# EAGLE board OpenBook_PCB (EAGLE 9.7.0)
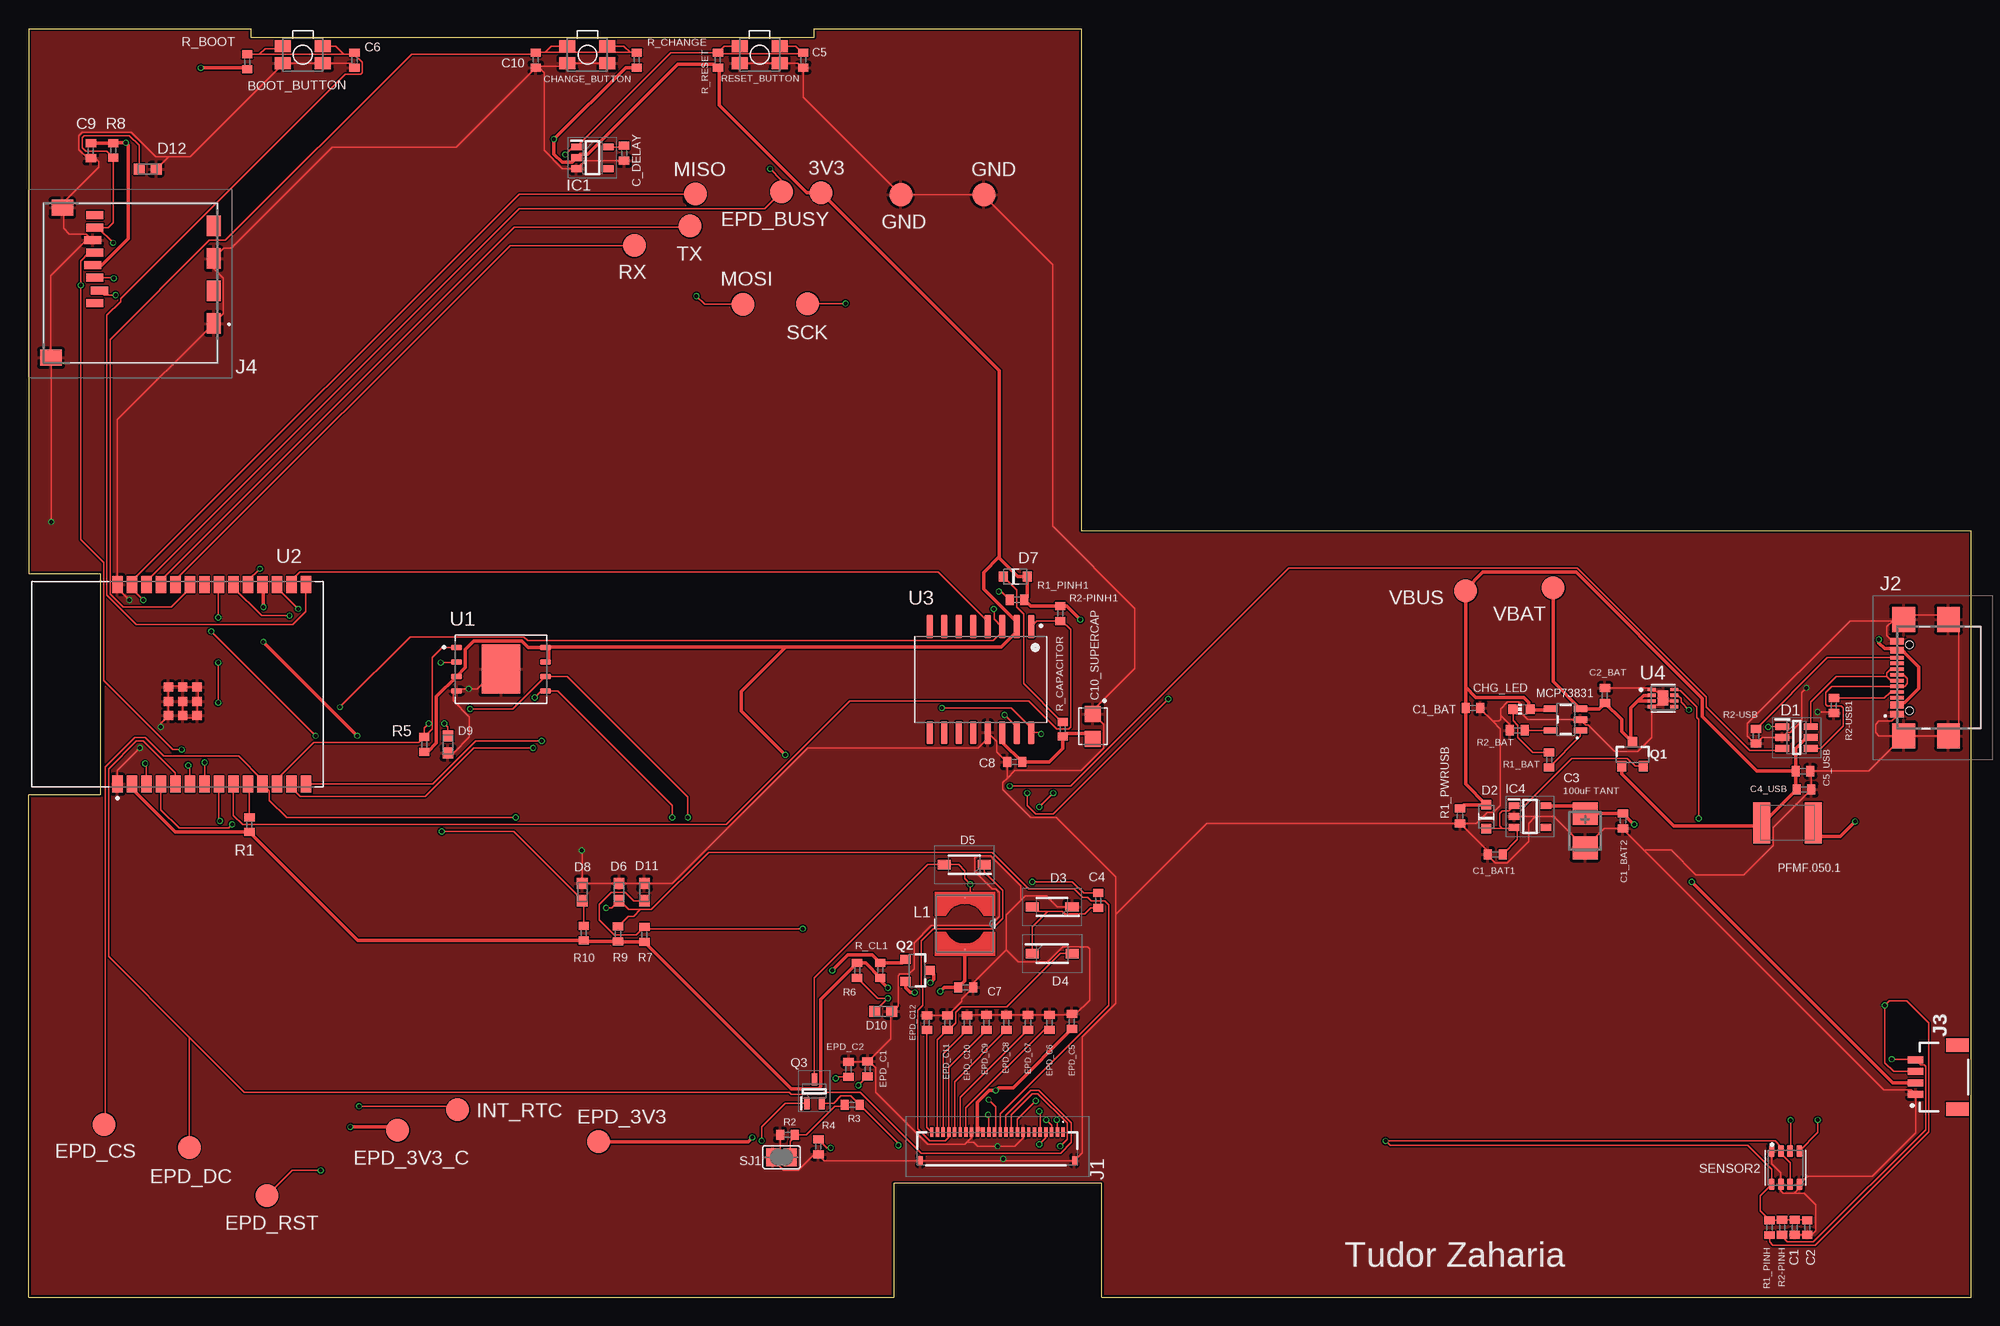
[diagram p0: board, top side]
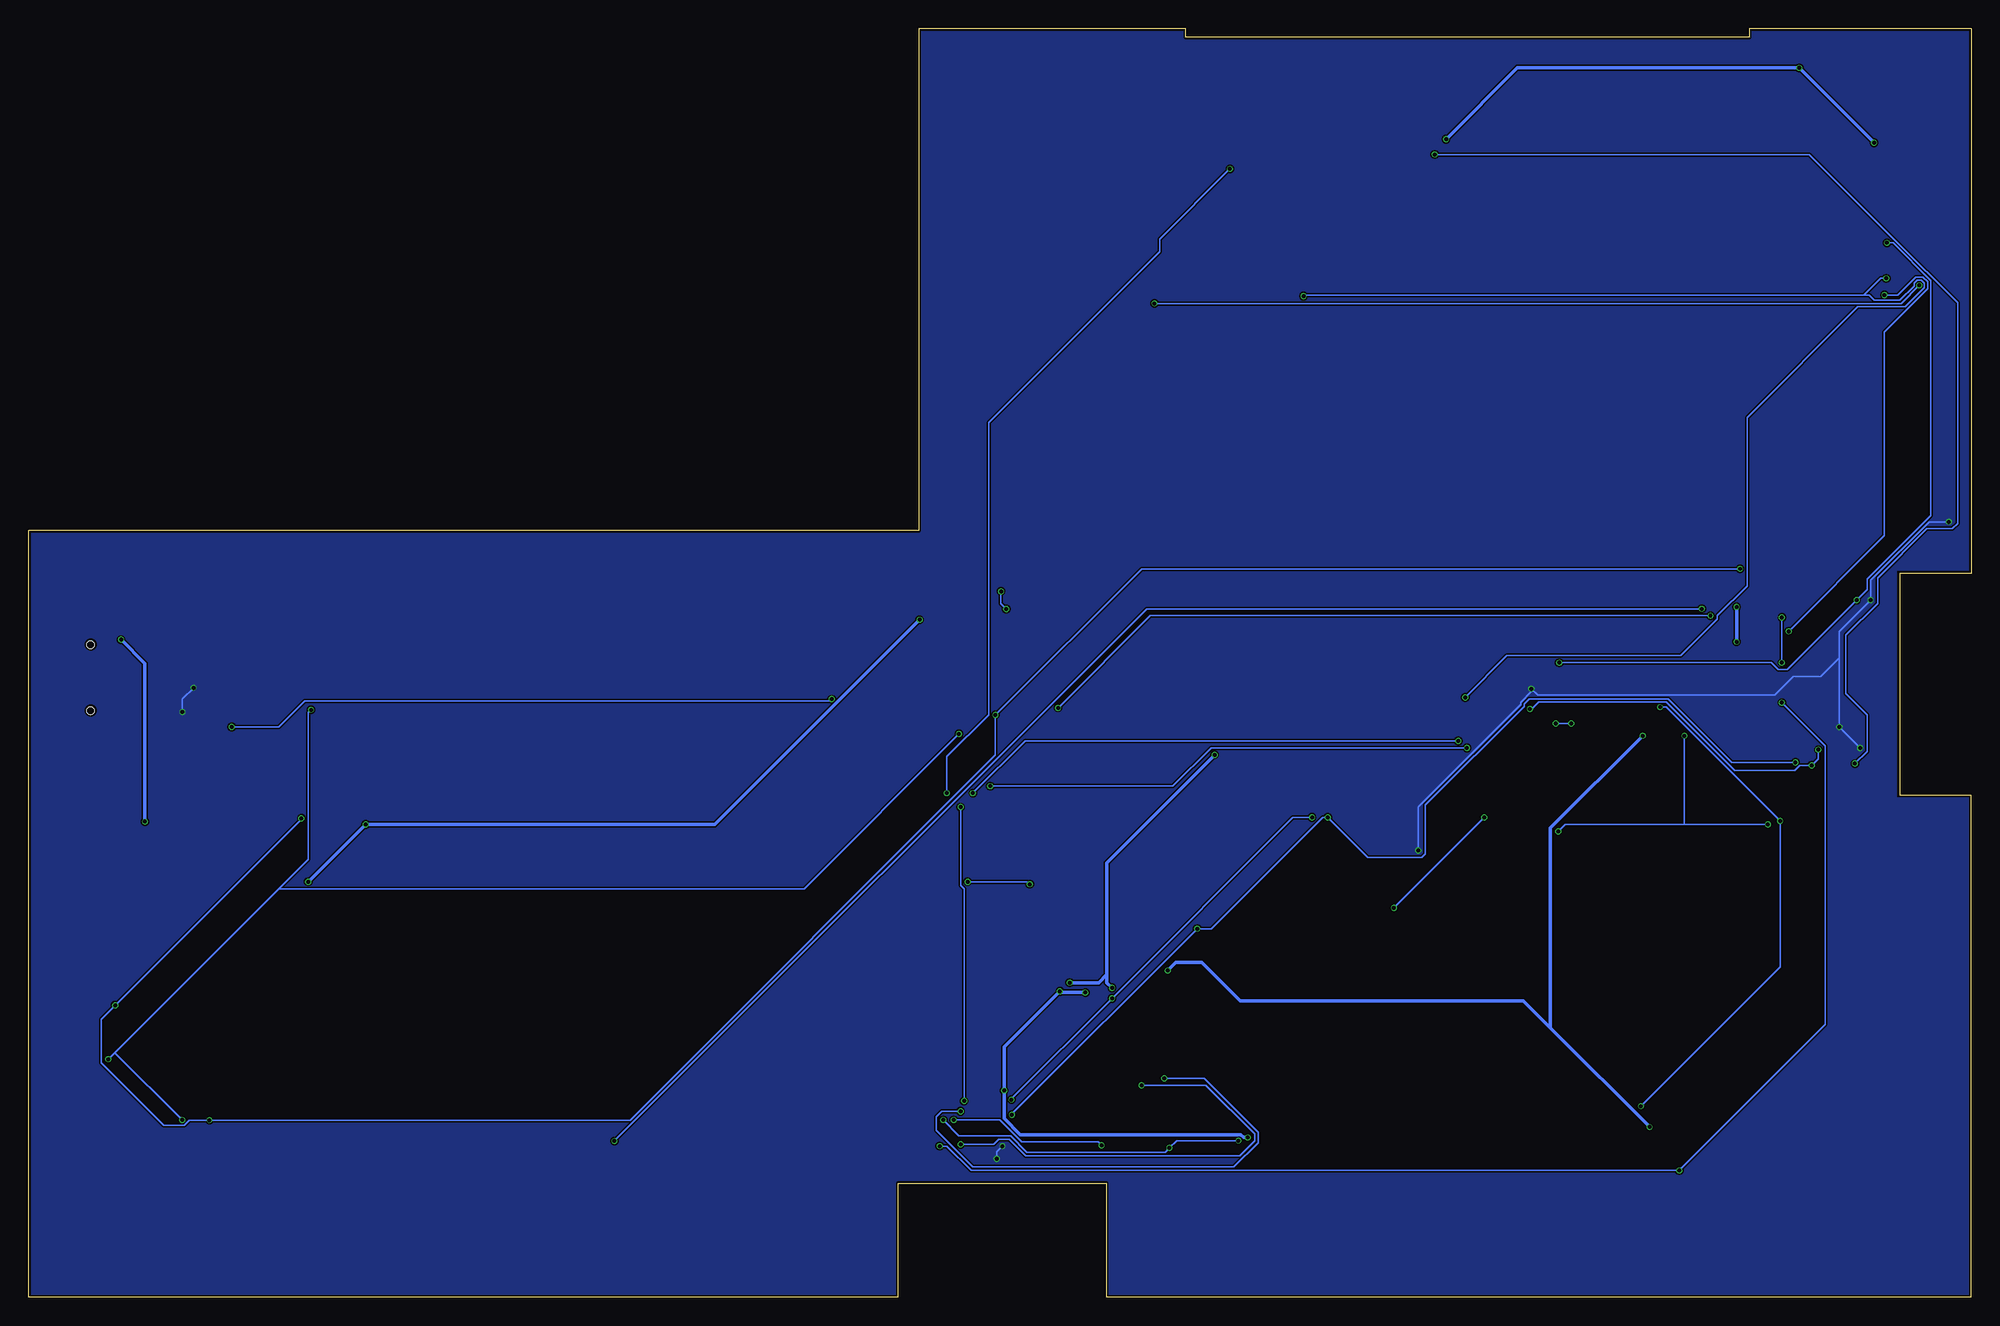
[diagram p1: board, bottom side, seen from below]

Size 170.2 x 111.2 mm. Coordinates in mm from the lower left corner, seen from the top.
Outline: 170.2,0 170.2,67.2 92.2,67.2 92.2,111.2 68.85,111.2 68.85,110.45 19.45,110.45 19.45,111.2 0,111.2 0,63.45 6.29,63.45 6.29,44.05 0,44.05 0,0 75.8,0 75.8,10 94,10 94,0 170.2,0
Copper layers (1*16): Top 0.035mm / dielectric 1.6mm / Bottom 0.035mm
Design rules "jlcpcb-2layers.dru *": minimum track width 5mil, minimum drill 0.3mm, track to track 5mil, track to pad 5mil, pad to pad 5mil, via to via 5mil, smd to smd 5mil, copper to edge 0.2mm, drill to drill 6mil, minimum pad ring 10mil, minimum via ring 3mil, stop-mask expansion 4mil, vias tented up to drill 0mil, thermal gap 10mil

## Footprints (pad centres in the part's own frame; a part is rotated, then mirrored left to right if it is on the bottom)
MYBUTTON = smd 1.4 x 1.05: 1 1.75,0.75; 2 -1.75,0.75; 3 -1.75,-0.75; 4 1.75,-0.75
EAGLE-LTSPICE_C0402 = smd 0.7 x 0.9: 1 -0.65,0; 2 0.65,0
RCL_CT3528 = smd 2 x 2.2: + -1.5,0; - 1.5,0
CAPCP3225X100N = smd 1.4 x 1.4: 1 -1.1,0; 2 1.1,0
ADAFRUIT_CHIP-LED0603 = smd 0.8 x 0.8: A 0,-0.75; C 0,0.75
SOT95P280X145-6N = smd 1.2 x 0.6: 1 -1.25,0.95; 2 -1.25,0; 3 -1.25,-0.95; 4 1.25,-0.95; 5 1.25,0; 6 1.25,0.95
ESP32_WROVER_AVX---SD0805S020S1R0_AVX_SD0805S020S1R0_0 = smd 0.8 x 0.9: 1 -1.05,0; 2 1.05,0
SOD3716X135N = smd 1.15 x 0.8: 1 -1.75,0; 2 1.75,0
DIOC1608X36N = smd 0.97 x 0.94: 1 -0.75,0; 2 0.75,0
SOT95P280X125-5N = smd 0.9 x 0.6: 1 -1.4,0.95; 2 -1.4,0; 3 -1.4,-0.95; 4 1.4,-0.95; 5 1.4,0.95
SOT95P280X120-5N = smd 0.9 x 0.6: 1 -1.4,0.95; 2 -1.4,0; 3 -1.4,-0.95; 4 1.4,-0.95; 5 1.4,0.95
FH34SRJ24S05SH99 = smd 0.3 x 0.8: 1 5.75,1.45; 2 5.25,1.45; 3 4.75,1.45; 4 4.25,1.45; 5 3.75,1.45; 6 3.25,1.45; 7 2.75,1.45; 8 2.25,1.45; 9 1.75,1.45; 10 1.25,1.45; 11 0.75,1.45; 12 0.25,1.45; 13 -0.25,1.45; 14 -0.75,1.45; 15 -1.25,1.45; 16 -1.75,1.45; 17 -2.25,1.45; 18 -2.75,1.45; 19 -3.25,1.45; 20 -3.75,1.45; 21 -4.25,1.45; 22 -4.75,1.45; 23 -5.25,1.45; 24 -5.75,1.45 | smd 0.4 x 0.8: MP1 6.75,-1.05; MP2 -6.75,-1.05
SAMACSYS_PARTS_USB4110GFA = smd 0.3 x 1.15: A1 -3.35,3.678; A4 -2.55,3.678; A5 -1.25,3.678; A6 -0.25,3.678; A7 0.25,3.678; A8 1.25,3.678; A9 2.55,3.678; A12 3.35,3.678; B1 3.05,3.678; B4 2.25,3.678; B5 1.75,3.678; B6 0.75,3.678; B7 -0.75,3.678; B8 -1.75,3.678; B9 -2.25,3.678; B12 -3.05,3.678 | smd 2.18 x 2: MP1 -5.11,-0.827; MP2 5.11,-0.827; MP3 -5.11,3.103; MP4 5.11,3.103 | hole 0.65: -2.89,2.603; 2.89,2.603
JST04_1MM_RA = smd 0.6 x 1.35: 1 -1.5,0; 2 -0.5,0; 3 0.5,0; 4 1.5,0 | smd 1.2 x 2: NC1 2.8,-3.675; NC2 -2.8,-3.675
112ATAARR03ATTEND = smd 1.8 x 1.2: G1 10.6,10.4; G2 4.9,10.4; S1 7.75,10.4; S2 2.05,10.4 | smd 1.4 x 1.9: G3 13.6,-3.85; G4 0.45,-2.85 | smd 0.7 x 1.5: P1 8.8,0; P2 7.7,0.4; P3 6.6,0; P4 5.5,-0.2; P5 4.4,0; P6 3.3,-0.2; P7 2.2,0; P8 1.1,0
IND_4828-WE-TPC_WRE = smd 0.127 x 0.127: 1 -2.286,0; 2 2.286,0
ESP32_WROVER_SPARKFUN-IC-POWER_SOT23-5 = smd 0.55 x 1.2: 1 -0.95,-1.3; 2 0,-1.3; 3 0.95,-1.3; 4 0.95,1.3; 5 -0.95,1.3
ESP32C6_VARISTOR_CT/CN1812 = smd 1.5 x 3.6: 1 -2.25,0; 2 2.25,0
ESP32_WROVER_SPARKFUN-DISCRETESEMI_SOT23-3 = smd 0.8 x 0.9: 1 -0.95,-1; 2 0.95,-1; 3 0,1.1
SOT65P210X110-3N = smd 1.05 x 0.5: 1 -1.05,0.65; 2 -1.05,-0.65; 3 1.05,0
ESP32_WROVER_EAGLE-LTSPICE_R0402 = smd 0.7 x 0.9: 1 -0.65,0; 2 0.65,0
ESP32_WROVER_BME680_PSON80P300X300X100-8N = smd 1.016 x 0.5: 1 1.458,1.2; 2 1.458,0.4; 3 1.458,-0.4; 4 1.458,-1.2; 5 -1.458,-1.22; 6 -1.458,-0.4; 7 -1.458,0.4; 8 -1.458,1.2
SJ = smd 1.168 x 1.6: 1 -0.762,0; 2 0.762,0
TP20R = smd 2 x 2: TP 0,0
SON127P600X800X80-9N = smd 0.94 x 0.44: 1 -3.895,1.905; 2 -3.895,0.635; 3 -3.895,-0.635; 4 -3.895,-1.905; 5 3.895,-1.905; 6 3.895,-0.635; 7 3.895,0.635; 8 3.895,1.905 | smd 3.4 x 4.3: 9 0,0
XCVR_ESP32-C6-WROOM-1-N8 = smd 1.5 x 0.9: 1 -8.75,5.26; 2 -8.75,3.99; 3 -8.75,2.72; 4 -8.75,1.45; 5 -8.75,0.18; 6 -8.75,-1.09; 7 -8.75,-2.36; 8 -8.75,-3.63; 9 -8.75,-4.9; 10 -8.75,-6.17; 11 -8.75,-7.44; 12 -8.75,-8.71; 13 -8.75,-9.98; 14 -8.75,-11.25; 15 8.75,-11.25; 16 8.75,-9.98; 17 8.75,-8.71; 18 8.75,-7.44; 19 8.75,-6.17; 20 8.75,-4.9; 21 8.75,-3.63; 22 8.75,-2.36; 23 8.75,-1.09; 24 8.75,0.18; 25 8.75,1.45; 26 8.75,2.72; 27 8.75,3.99; 28 8.75,5.26 | smd 0.8 x 0.8: 29_1 -2.755,0.79; 29_2 -1.505,0.79; 29_3 -0.255,0.79; 29_4 -2.755,-0.46; 29_5 -1.505,-0.46; 29_6 -0.255,-0.46; 29_7 -2.755,-1.71; 29_8 -1.505,-1.71; 29_9 -0.255,-1.71
SOIC127P1032X265-16N = smd 2.05 x 0.59: 1 -4.655,4.445; 2 -4.655,3.175; 3 -4.655,1.905; 4 -4.655,0.635; 5 -4.655,-0.635; 6 -4.655,-1.905; 7 -4.655,-3.175; 8 -4.655,-4.445; 9 4.655,-4.445; 10 4.655,-3.175; 11 4.655,-1.905; 12 4.655,-0.635; 13 4.655,0.635; 14 4.655,1.905; 15 4.655,3.175; 16 4.655,4.445
SON50P200X200X80-9N = smd 0.76 x 0.27: 1 -0.985,0.75; 2 -0.985,0.25; 3 -0.985,-0.25; 4 -0.985,-0.75; 5 0.985,-0.75; 6 0.985,-0.25; 7 0.985,0.25; 8 0.985,0.75 | smd 0.9 x 1.3: 9 0,0

## Placement (x,y rotation side)
BOOT_BUTTON  BUTTON_CUSYOMV1  [MYBUTTON]  24.03,108.91 180 top
C1  100nF  [EAGLE-LTSPICE_C0402]  154.71,6.13 270 top
C1_BAT  4.7uF  [EAGLE-LTSPICE_C0402]  126.53,51.65 0 top
C1_BAT1  4.7uF  [EAGLE-LTSPICE_C0402]  128.48,38.82 180 top
C1_BAT2  4.7uF  [EAGLE-LTSPICE_C0402]  139.67,41.77 270 top
C2  100nF  [EAGLE-LTSPICE_C0402]  155.82,6.13 270 top
C2_BAT  4.7uF  [EAGLE-LTSPICE_C0402]  138.09,52.75 90 top
C3  100uF TANT  [RCL_CT3528]  136.36,40.9 270 top
C4  4.7uF/25V  [EAGLE-LTSPICE_C0402]  93.71,34.79 90 top
C4_USB  100nF  [EAGLE-LTSPICE_C0402]  155.53,44.52 0 top
C5  1uF  [EAGLE-LTSPICE_C0402]  67.86,108.43 270 top
C5_USB  4.7uF  [EAGLE-LTSPICE_C0402]  155.44,46.12 0 top
C6  100nF  [EAGLE-LTSPICE_C0402]  28.55,108.43 270 top
C7  10uF  [EAGLE-LTSPICE_C0402]  82.09,27.18 0 top
C8  100nF  [EAGLE-LTSPICE_C0402]  86.38,46.93 180 top
C9  100nF  [EAGLE-LTSPICE_C0402]  5.46,100.48 270 top
C10  100nF  [EAGLE-LTSPICE_C0402]  44.44,108.43 270 top
C10_SUPERCAP  CPH3225A  [CAPCP3225X100N]  93.24,50.04 270 top
C_DELAY  100nF  [EAGLE-LTSPICE_C0402]  52.17,100.27 270 top
CHANGE_BUTTON  BUTTON_CUSYOMV1  [MYBUTTON]  48.96,108.91 180 top
CHG_LED  [ADAFRUIT_CHIP-LED0603]  130.79,51.55 90 top
D1  USBLC6-2SC6Y  [SOT95P280X145-6N]  154.88,49.07 0 top
D2  ESP32_WROVER_AVX---SD0805S020S1R0_AVX_SD0805S020S1R0_0_0AVX_SD0805S020S1R0_0_0  [ESP32_WROVER_AVX---SD0805S020S1R0_AVX_SD0805S020S1R0_0]  127.69,42.13 90 top
D3  MBR0530  [SOD3716X135N]  89.66,34.22 180 top
D4  MBR0530  [SOD3716X135N]  89.67,30.13 0 top
D5  MBR0530  [SOD3716X135N]  81.96,37.93 180 top
D6  PGB1010603MR  [DIOC1608X36N]  51.73,35.52 90 top
D7  ESP32_WROVER_AVX---SD0805S020S1R0_AVX_SD0805S020S1R0_0_0AVX_SD0805S020S1R0_0_0  [ESP32_WROVER_AVX---SD0805S020S1R0_AVX_SD0805S020S1R0_0]  86.44,63.18 0 top
D8  PGB1010603MR  [DIOC1608X36N]  48.51,35.52 90 top
D9  PGB1010603MR  [DIOC1608X36N]  36.74,48.47 270 top
D10  PGB1010603MR  [DIOC1608X36N]  74.87,25.07 0 top
D11  PGB1010603MR  [DIOC1608X36N]  53.95,35.52 90 top
D12  PGB1010603MR  [DIOC1608X36N]  10.43,98.87 0 top
EPD_C1  1uF/50V  [EAGLE-LTSPICE_C0402]  73.5,20.02 90 top
EPD_C2  1uF/50V  [EAGLE-LTSPICE_C0402]  71.83,20 90 top
EPD_C5  0.1uF/50V  [EAGLE-LTSPICE_C0402]  91.4,24.19 90 top
EPD_C6  1uF/50V  [EAGLE-LTSPICE_C0402]  89.44,24.1 90 top
EPD_C7  1uF/50V  [EAGLE-LTSPICE_C0402]  87.55,24.1 90 top
EPD_C8  1uF/50V  [EAGLE-LTSPICE_C0402]  85.66,24.1 90 top
EPD_C9  1uF/50V  [EAGLE-LTSPICE_C0402]  83.92,24.1 90 top
EPD_C10  1uF/50V  [EAGLE-LTSPICE_C0402]  82.21,24.09 90 top
EPD_C11  1uF/50V  [EAGLE-LTSPICE_C0402]  80.49,24.09 90 top
EPD_C12  1uF/50V  [EAGLE-LTSPICE_C0402]  78.7,24.09 90 top
IC1  BD5229G-TR  [SOT95P280X125-5N]  49.4,99.87 0 top
IC4  XC6220A331MR-G  [SOT95P280X120-5N]  131.53,42.14 0 top
J1  FH34SRJ-24S-0.5SH_99_  [FH34SRJ24S05SH99]  84.87,13.04 0 top
J2  SAMACSYS_PARTS_USB4110-GF-A  [SAMACSYS_PARTS_USB4110GFA]  167.36,54.31 90 top
J3  QWIIC_RIGHT_ANGLE  [JST04_1MM_RA]  165.31,19.31 90 top
J4  112A-TAAR-R03_ATTEND  [112ATAARR03ATTEND]  5.82,95.95 270 top
L1  68uH  [IND_4828-WE-TPC_WRE]  82.02,32.75 270 top
MCP73831  ESP32_WROVER_SPARKFUN-IC-POWER_MCP73831  [ESP32_WROVER_SPARKFUN-IC-POWER_SOT23-5]  134.65,50.64 90 top
PFMF.050.1  ESP32C6_VARISTORCN1812  [ESP32C6_VARISTOR_CT/CN1812]  154.09,41.6 180 top
Q1  20V/4.2A/52mΩ/1.4W  [ESP32_WROVER_SPARKFUN-DISCRETESEMI_SOT23-3]  140.51,47.56 0 top
Q2  20V/4.2A/52mΩ/1.4W  [ESP32_WROVER_SPARKFUN-DISCRETESEMI_SOT23-3]  77.83,28.66 270 top
Q3  SI1308EDL-T1-GE3  [SOT65P210X110-3N]  68.84,18.08 90 top
R1  10K  [ESP32_WROVER_EAGLE-LTSPICE_R0402]  19.35,41.43 90 top
R1_BAT  200  [ESP32_WROVER_EAGLE-LTSPICE_R0402]  133.2,47.1 90 top
R1_PINH  10K  [ESP32_WROVER_EAGLE-LTSPICE_R0402]  152.51,6.12 90 top
R1_PINH1  10K  [ESP32_WROVER_EAGLE-LTSPICE_R0402]  86.59,61.14 0 top
R1_PWRUSB  100K  [ESP32_WROVER_EAGLE-LTSPICE_R0402]  125.4,42.19 90 top
R2  2.2  [ESP32_WROVER_EAGLE-LTSPICE_R0402]  66.48,14.26 0 top
R2-PINH  10K  [ESP32_WROVER_EAGLE-LTSPICE_R0402]  153.61,6.14 90 top
R2-PINH1  10K  [ESP32_WROVER_EAGLE-LTSPICE_R0402]  90.38,59.94 90 top
R2-USB  5k1  [ESP32_WROVER_EAGLE-LTSPICE_R0402]  151.33,49.18 270 top
R2-USB1  5k1  [ESP32_WROVER_EAGLE-LTSPICE_R0402]  158.15,51.87 90 top
R2_BAT  2K  [ESP32_WROVER_EAGLE-LTSPICE_R0402]  130.41,49.7 0 top
R3  0.47  [ESP32_WROVER_EAGLE-LTSPICE_R0402]  72.16,16.88 180 top
R4  10K  [ESP32_WROVER_EAGLE-LTSPICE_R0402]  69.19,13.21 270 top
R5  10K  [ESP32_WROVER_EAGLE-LTSPICE_R0402]  34.66,48.46 270 top
R6  10K  [ESP32_WROVER_EAGLE-LTSPICE_R0402]  72.58,28.66 90 top
R7  10K  [ESP32_WROVER_EAGLE-LTSPICE_R0402]  53.95,31.81 270 top
R8  10K  [ESP32_WROVER_EAGLE-LTSPICE_R0402]  7.42,100.51 90 top
R9  10K  [ESP32_WROVER_EAGLE-LTSPICE_R0402]  51.64,31.86 270 top
R10  10K  [ESP32_WROVER_EAGLE-LTSPICE_R0402]  48.63,31.93 270 top
R_BOOT  10K  [ESP32_WROVER_EAGLE-LTSPICE_R0402]  19.16,108.28 90 top
R_CAPACITOR  15  [ESP32_WROVER_EAGLE-LTSPICE_R0402]  90.6,49.79 90 top
R_CHANGE  10K  [ESP32_WROVER_EAGLE-LTSPICE_R0402]  53.27,108.43 90 top
R_CL1  10K  [ESP32_WROVER_EAGLE-LTSPICE_R0402]  74.61,28.68 90 top
R_RESET  10K  [ESP32_WROVER_EAGLE-LTSPICE_R0402]  60.39,108.43 90 top
RESET_BUTTON  BUTTON_CUSYOMV1  [MYBUTTON]  64.05,108.91 180 top
SENSOR2  BME688  [ESP32_WROVER_BME680_PSON80P300X300X100-8N]  153.91,11.37 90 top
SJ1  [SJ]  65.96,12.29 0 top
TP1  TX  [TP20R]  57.96,93.89 0 top
TP2  RX  [TP20R]  53.08,92.19 0 top
TP3  VBAT  [TP20R]  133.55,62.19 0 top
TP4  GND  [TP20R]  76.42,96.64 0 top
TP5  GND  [TP20R]  83.69,96.64 0 top
TP6  MISO  [TP20R]  58.41,96.69 0 top
TP7  MOSI  [TP20R]  62.58,87.04 0 top
TP8  SCK  [TP20R]  68.25,87.09 0 top
TP9  EPD_BUSY  [TP20R]  65.97,96.89 0 top
TP10  EPD_CS  [TP20R]  6.63,15.16 0 top
TP11  EPD_DC  [TP20R]  14.09,13.14 0 top
TP12  EPD_RST  [TP20R]  20.88,8.91 0 top
TP13  EPD_3V3_C  [TP20R]  32.33,14.66 0 top
TP14  VBUS  [TP20R]  125.88,61.91 0 top
TP15  INT_RTC  [TP20R]  37.58,16.46 0 top
TP16  3V3  [TP20R]  69.43,96.81 0 top
TP17  EPD_3V3  [TP20R]  49.93,13.66 0 top
U1  W25Q512JVEIQ  [SON127P600X800X80-9N]  41.39,55.06 0 top
U2  ESP32-C6-WROOM-1-N8  [XCVR_ESP32-C6-WROOM-1-N8]  13.05,53.74 90 top
U3  DS3231SN#  [SOIC127P1032X265-16N]  83.4,54.15 270 top
U4  MAX17048G+T10  [SON50P200X200X80-9N]  143.19,52.52 0 top

## Library data of the parts
BOOT_BUTTON CHANGE_BUTTON CHG_LED PFMF.050.1 RESET_BUTTON SJ1 TP1-TP17 = DeskAssistant v19 v1
C1 C1_BAT C1_BAT1 C1_BAT2 C2 C2_BAT C4 C4_USB C5 C5_USB C6-C10 C_DELAY EPD_C1 EPD_C2 EPD_C5-EPD_C12 = DeskAssistant v19 v1; SPICEMODEL: NONE; SPICEPREFIX: C
C3 = DeskAssistant v19 v1; SPICEPREFIX: C
C10_SUPERCAP = DeskAssistant v19 v1; AVAILABILITY: Not in stock; CHECK_PRICES: https://www.snapeda.com/parts/CPH3225A/Seiko+Instruments/view-part/?ref=eda; DESCRIPTION: 11 mF (EDLC) Supercapacitor 3.3 V 1210 (3225 Metric) - -; MF: Seiko Instruments; MP: CPH3225A; PACKAGE: 1210 Seiko; PRICE: None; PURCHASE-URL: https://www.snapeda.com/api/url_track_click_mouser/?unipart_id=562593&manufacturer=Seiko Instruments&part_name=CPH3225A&search_term=None; SNAPEDA_LINK: https://www.snapeda.com/parts/CPH3225A/Seiko+Instruments/view-part/?ref=snap
D1 = DeskAssistant v19 v1; AVAILABILITY: In Stock; CHECK_PRICES: https://www.snapeda.com/parts/USBLC6-2SC6Y/STMicroelectronics/view-part/?ref=eda; DESCRIPTION: 17V Clamp 5A (8/20µs) Ipp Tvs Diode Surface Mount SOT-23-6; MF: STMicroelectronics; MP: USBLC6-2SC6Y; PACKAGE: SOT-23-6 STMicroelectronics; PRICE: None; SNAPEDA_LINK: https://www.snapeda.com/parts/USBLC6-2SC6Y/STMicroelectronics/view-part/?ref=snap
D2 D7 = DeskAssistant v19 v1; CENTROID_NOT_SPECIFIED: No; DATASHEET: http://datasheets.avx.com/schottky.pdf; DIGIKEY_DESCRIPTION: DIODE SCHOTTKY 20V 1A 0805; DIGIKEY_PART_NUMBER: 478-7800-1-ND; LEAD_FREE: yes; MF: AVX; MOUSER_PART_NUMBER: 581-SD0805S020S1R0; PACKAGE: 0805 (2012 metric); PREFIX: D; ROHS: yes; TEMPERATURE_RANGE_HIGH: +125°C; TEMPERATURE_RANGE_LOW: -55°C
D3-D5 = DeskAssistant v19 v1; AVAILABILITY: In Stock; CHECK_PRICES: https://www.snapeda.com/parts/MBR0530/Onsemi/view-part/?ref=eda; DESCRIPTION: Diode Schottky 30 V 500mA Surface Mount SOD-123; MF: ON Semiconductor; MP: MBR0530; PACKAGE: SOD-123-2 ON Semiconductor; PRICE: None; PURCHASE-URL: https://www.snapeda.com/api/url_track_click_mouser/?unipart_id=179458&manufacturer=ON Semiconductor&part_name=MBR0530&search_term=None; SNAPEDA_LINK: https://www.snapeda.com/parts/MBR0530/Onsemi/view-part/?ref=snap
D6 D8-D12 = DeskAssistant v19 v1; AVAILABILITY: In Stock; CHECK_PRICES: https://www.snapeda.com/parts/PGB1010603MR/Littelfuse/view-part/?ref=eda; DESCRIPTION: 150V (Typ) Clamp - Ipp Tvs Diode Surface Mount 0603 (1608 Metric); MF: Littelfuse Inc.; MP: PGB1010603MR; PACKAGE: 0603 Littelfuse Inc.; PRICE: None; PURCHASE-URL: https://www.snapeda.com/api/url_track_click_mouser/?unipart_id=5659453&manufacturer=Littelfuse Inc.&part_name=PGB1010603MR&search_term=None; SNAPEDA_LINK: https://www.snapeda.com/parts/PGB1010603MR/Littelfuse/view-part/?ref=snap
IC1 = DeskAssistant v19 v1; DESCRIPTION: Voltage Detector with Adjustable Delay Time: CMOS processes are utilized to develop high precision, low current consumption CMOS reset ICs that allow arbitrary setting of the delay time. The extensive lineup includes both Nch Open Drain and CMOS output types in a wide range of detection voltages (from 2.3V to 6.0V, in 0.1V steps), enabling selection of the ideal solution based on customer requirements. In addition, the entire series is of course both lead-free and RoHS-compliant.; HEIGHT: 1.25mm; MANUFACTURER_NAME: ROHM Semiconductor; MANUFACTURER_PART_NUMBER: BD5229G-TR; MOUSER_PART_NUMBER: 755-BD5229G-TR; MOUSER_PRICE-STOCK: https://www.mouser.co.uk/ProductDetail/ROHM-Semiconductor/BD5229G-TR?qs=4kLU8WoGk0vvnhrrYwdszw%3D%3D
IC4 = DeskAssistant v19 v1; DESCRIPTION: LDO Voltage Regulators; HEIGHT: 1.2mm; MANUFACTURER_NAME: Torex; MANUFACTURER_PART_NUMBER: XC6220A331MR-G; MOUSER_PART_NUMBER: 865-XC6220A331MR-G; MOUSER_PRICE-STOCK: https://www.mouser.co.uk/ProductDetail/Torex-Semiconductor/XC6220A331MR-G?qs=AsjdqWjXhJ8ZSWznL1J0gg%3D%3D
J1 = DeskAssistant v19 v1; DESCRIPTION: 24 Position FFC, FPC Connector Contacts, Top and Bottom 0.020" (0.50mm) Surface Mount, Right Angle; HEIGHT: 1.1mm; MANUFACTURER_NAME: Hirose; MANUFACTURER_PART_NUMBER: FH34SRJ-24S-0.5SH(99); MOUSER_PART_NUMBER: 798-FH34SRJ24S05SH99; MOUSER_PRICE-STOCK: https://www.mouser.co.uk/ProductDetail/Hirose-Connector/FH34SRJ-24S-0.5SH99?qs=vcbW%252B4%252BSTIpKBl5ap9J8Fw%3D%3D
J2 = DeskAssistant v19 v1; DESCRIPTION: CONN USB 2.0 TYPE-C R/A SMT; HEIGHT: 3.26mm; MANUFACTURER_NAME: GCT (GLOBAL CONNECTOR TECHNOLOGY); MANUFACTURER_PART_NUMBER: USB4110-GF-A; MOUSER_PART_NUMBER: 640-USB4110-GF-A; MOUSER_PRICE-STOCK: https://www.mouser.co.uk/ProductDetail/GCT/USB4110-GF-A?qs=KUoIvG%2F9IlYiZvIXQjyJeA%3D%3D
J3 = DeskAssistant v19 v1; PROD_ID: CONN-13694
J4 = DeskAssistant v19 v1; DESCRIPTION: Micro SD Card Socket, Push-Push Type, Top Mount, SMT, H=1.83mm, 10u; HEIGHT: 1.9mm; MANUFACTURER_NAME: ATTEND; MANUFACTURER_PART_NUMBER: 112A-TAAR-R03 ATTEND
L1 = DeskAssistant v19 v1; COPYRIGHT: Copyright (C) 2024 Ultra Librarian. All rights reserved.; MANUFACTURER_PART_NUMBER: 744043680; MFR_NAME: Wurth Electronics
MCP73831 = DeskAssistant v19 v1; PROD_ID: IC-09995
Q1 Q2 = DeskAssistant v19 v1; PROD_ID: TRAN-14388
Q3 = DeskAssistant v19 v1; AVAILABILITY: In Stock; CHECK_PRICES: https://www.snapeda.com/parts/SI1308EDL-T1-GE3/Vishay+Siliconix/view-part/?ref=eda; DESCRIPTION: Si1308EDL-T1-GE3 N-channel MOSFET Transistor, 1.5 A, 30 V, 3-Pin SC-70 | Siliconix / Vishay SI1308EDL-T1-GE3; MF: Vishay Siliconix; MP: SI1308EDL-T1-GE3; PACKAGE: SOT-323 Vishay Semiconductor; PRICE: None; PURCHASE-URL: https://www.snapeda.com/api/url_track_click_mouser/?unipart_id=274603&manufacturer=Vishay Siliconix&part_name=SI1308EDL-T1-GE3&search_term=None; SNAPEDA_LINK: https://www.snapeda.com/parts/SI1308EDL-T1-GE3/Vishay+Siliconix/view-part/?ref=snap
R1 R1_BAT R1_PINH R1_PINH1 R1_PWRUSB R2 R2-PINH R2-PINH1 R2-USB R2-USB1 R2_BAT R3-R10 R_BOOT R_CAPACITOR R_CHANGE R_CL1 R_RESET = DeskAssistant v19 v1; SPICEMODEL: NONE; SPICEPREFIX: R
SENSOR2 = DeskAssistant v19 v1; AVAILABILITY: Unavailable; DESCRIPTION: Integrated Environmental Unit; MF: Bosch Sensortec; MP: BME680; PACKAGE: LGA-8 Bosch Tools; PRICE: None
U1 = DeskAssistant v19 v1; AVAILABILITY: In Stock; CHECK_PRICES: https://www.snapeda.com/parts/W25Q512JVEIQ/Winbond+Electronics/view-part/?ref=eda; DESCRIPTION: FLASH - NOR Memory IC 512Mb (64M x 8) SPI - Quad I/O 133 MHz 8-WSON (8x6); MF: Winbond Electronics; MP: W25Q512JVEIQ; PACKAGE: Package; PRICE: None; SNAPEDA_LINK: https://www.snapeda.com/parts/W25Q512JVEIQ/Winbond+Electronics/view-part/?ref=snap
U2 = DeskAssistant v19 v1; AVAILABILITY: In Stock; CHECK_PRICES: https://www.snapeda.com/parts/ESP32-C6-WROOM-1-N8/Espressif+Systems/view-part/?ref=eda; DESCRIPTION: Multiprotocol Modules ESP32-C6 module, Wi-Fi 6 in 2.4 GHz band, Bluetooth 5, Zigbee 3.0 and Thread. ESP34-WROOM Compatible - ENGINEERING SAMPLE; MF: Espressif Systems; MP: ESP32-C6-WROOM-1-N8; PACKAGE: None; PRICE: None; SNAPEDA_LINK: https://www.snapeda.com/parts/ESP32-C6-WROOM-1-N8/Espressif+Systems/view-part/?ref=snap
U3 = DeskAssistant v19 v1; AVAILABILITY: In Stock; CHECK_PRICES: https://www.snapeda.com/parts/DS3231SN%23/Analog+Devices/view-part/?ref=eda; DESCRIPTION: Extremely Accurate I²C-Integrated RTC/TCXO/Crystal; MF: Analog Devices; MP: DS3231SN#; PACKAGE: SOIC-16 Maxim; PRICE: None; PURCHASE-URL: https://www.snapeda.com/api/url_track_click_mouser/?unipart_id=99048&manufacturer=Analog Devices&part_name=DS3231SN#&search_term=None; SNAPEDA_LINK: https://www.snapeda.com/parts/DS3231SN%23/Analog+Devices/view-part/?ref=snap
U4 = DeskAssistant v19 v1; AVAILABILITY: In Stock; CHECK_PRICES: https://www.snapeda.com/parts/MAX17048G+T10/Analog+Devices/view-part/?ref=eda; DESCRIPTION: 3µA 1-Cell/2-Cell Fuel Gauge with ModelGauge; MF: Analog Devices; MP: MAX17048G+T10; PACKAGE: TDFN-8 Maxim; PRICE: None; PURCHASE-URL: https://www.snapeda.com/api/url_track_click_mouser/?unipart_id=329239&manufacturer=Analog Devices&part_name=MAX17048G+T10&search_term=None; SNAPEDA_LINK: https://www.snapeda.com/parts/MAX17048G+T10/Analog+Devices/view-part/?ref=snap

## Nets
3V3: C1_BAT2.1 C3.+ C9.1 D7.2 IC1.2 IC4.5 J3.2 J4.P4 Q2.3 R1.1 R1_PINH1.2 R2-PINH1.2 R5.2 R6.2 R7.2 R8.2 R9.2 R10.2 R_BOOT.1 R_CHANGE.1 R_CL1.1 R_RESET.1 TP16.TP U1.3 U1.7 U1.8 U2.2 U3.2
32KHZ: R2-PINH1.1 U2.9 U3.1
DN: D1.4 J2.A7 J2.B7
DP: D1.6 J2.A6 J2.B6
EPD_3V3: C7.1 EPD_C5.1 J1.15 J1.16 L1.2 Q2.2 TP17.TP
EPD_3V3_C: Q2.1 R_CL1.2 TP13.TP U2.18
EPD_BUSY: J1.9 TP9.TP U2.26
EPD_CS: D6.1 J1.12 R9.1 TP10.TP U2.11
EPD_DC: J1.11 TP11.TP U2.5
EPD_RST: J1.10 TP12.TP U2.21
FLASH_CS: D9.1 R5.1 U1.1 U2.12
GDR: J1.2 Q3.1 R4.1
GND: BOOT_BUTTON.1 BOOT_BUTTON.2 C1.2 C1_BAT1.2 C1_BAT2.2 C1_BAT.2 C2.2 C2_BAT.2 C3.- C4_USB.2 C5.2 C5_USB.2 C6.2 C7.2 C8.2 C9.2 C10.2 C10_SUPERCAP.1 C_DELAY.2 CHANGE_BUTTON.1 CHANGE_BUTTON.2 D1.2 D3.1 D6.2 D8.2 D9.2 D10.2 D11.2 D12.2 EPD_C1.2 EPD_C2.2 EPD_C5.2 EPD_C6.2 EPD_C7.2 EPD_C8.2 EPD_C9.2 EPD_C10.2 EPD_C11.2 EPD_C12.2 IC1.3 IC4.2 J1.8 J1.17 J1.MP1 J1.MP2 J2.A1 J2.A12 J2.B1 J2.B12 J2.MP1 J2.MP2 J2.MP3 J2.MP4 J3.1 J4.G1 J4.G2 J4.G3 J4.G4 J4.P6 MCP73831.2 R1_PWRUSB.1 R2-USB1.1 R2-USB.2 R2.1 R2_BAT.1 R4.2 RESET_BUTTON.1 RESET_BUTTON.2 SENSOR2.1 SENSOR2.5 SENSOR2.7 SJ1.1 TP4.TP TP5.TP U1.4 U1.9 U2.1 U2.28 U2.29_1 U2.29_2 U2.29_3 U2.29_4 U2.29_5 U2.29_6 U2.29_7 U2.29_8 U2.29_9 U3.13 U4.1 U4.4 U4.6 U4.9
GPIO8: R1.2 U2.10
I2C_PW: C1.1 C2.1 R1_PINH.2 R2-PINH.2 SENSOR2.2 SENSOR2.6 SENSOR2.8 U2.17
INT_RTC: R1_PINH1.1 TP15.TP U2.8 U3.3
IO/BOOT: BOOT_BUTTON.3 BOOT_BUTTON.4 C6.1 R_BOOT.2 U2.15
IO/CHANGE: C10.1 CHANGE_BUTTON.3 CHANGE_BUTTON.4 R_CHANGE.2 U2.23
MISO: D12.1 J4.P7 R8.1 TP6.TP U1.2 U2.27
MOSI: D11.1 J1.14 J4.P3 R7.1 TP7.TP U1.5 U2.7
N$1: J2.A5 R2-USB1.2
N$2: J2.B5 R2-USB.1
N$3: C1_BAT1.1 D2.1 IC4.1 IC4.3 Q1.2
N$4: C4.1 D3.2 D4.1
N$5: MCP73831.1 R1_BAT.1
N$6: CHG_LED.C R1_BAT.2
N$7: MCP73831.5 R2_BAT.2
N$8: EPD_C12.1 J1.24
N$9: D7.1 R_CAPACITOR.2
N$10: EPD_C10.1 J1.22
N$11: C_DELAY.1 IC1.5
N$12: EPD_C8.1 J1.20
N$13: EPD_C7.1 J1.19
N$14: EPD_C6.1 J1.18
N$16: EPD_C2.1 J1.5
N$17: EPD_C1.1 J1.4
PREVGH: D5.1 EPD_C9.1 J1.21
PREVGL: D4.2 EPD_C11.1 J1.23
RESE: J1.3 Q3.2 R3.1
RESE': R2.2 R3.2 SJ1.2
RESET: C5.1 IC1.1 R_RESET.2 RESET_BUTTON.3 RESET_BUTTON.4 U2.3
RTC_RST: U2.16 U3.4
RX: TP2.TP U2.24
SCK: D10.1 J1.13 J4.P5 R6.1 TP8.TP U1.6 U2.6
SCL: J3.4 R2-PINH.1 SENSOR2.4 U2.20 U3.16 U4.7
SDA: J3.3 R1_PINH.1 SENSOR2.3 U2.19 U3.15 U4.8
SRC: C4.2 D5.2 L1.1 Q3.3
SS_SD: D8.1 J4.P2 R10.1 U2.4
TX: TP1.TP U2.25
USB_D+: D1.1 U2.14
USB_D-: D1.3 U2.13
VBAT: C2_BAT.1 MCP73831.3 Q1.3 TP3.TP U4.2 U4.3
VBUS: C1_BAT.1 C4_USB.1 C5_USB.1 CHG_LED.A D1.5 D2.2 MCP73831.4 PFMF.050.1.2 Q1.1 R1_PWRUSB.2 TP14.TP
VRTC: C8.1 C10_SUPERCAP.2 R_CAPACITOR.1 U3.14
VUSB: J2.A4 J2.A9 J2.B4 J2.B9 PFMF.050.1.1

## Tracks (layer width: path | path; a pad name or v marks a point on that pad's centre or on a via)
3V3  (via drill 0.35)
  Top 0.3: v145.69,36.42 163.31,18.81 J3.2 | 85.04,64.91 85.04,64.81 86.67,63.18 D7.2 87.49,61.39 R1_PINH1.2 87.79,60.59 R2-PINH1.2 90.94,60.59 v92.14,59.39 | 66.29,57 85.2,57 86.58,58.37 U3.2 86.58,59.2 83.68,62.1 83.68,63.55 85.04,64.91 | R5.2 34.96,47.81 35.73,48.58 35.73,52.65 37.51,54.42 | v15.09,107.75 19.05,107.75 R_BOOT.1 | v66.29,47.55 62.45,51.39 62.45,53.1 66.29,56.94 66.29,57 | U2.2 9.06,44.59 12.87,40.78 R1.1 28.85,31.28 R10.2 48.7,31.21 R9.2 51.69,31.16 R7.2 66.82,18.29 69.2,18.29 69.39,18.48 69.39,19.78 69.39,26.12 R6.2 73.33,29.31 R_CL1.1 74.61,27.8 v75.29,27.13 | IC4.5 135.67,43.09 C3.+ 139.65,42.4 C1_BAT2.1 140.64,41.45 v140.66,41.45 | 37.51,54.42 38.27,55.18 38.27,56.8 38.98,57.51 43.22,57.51 43.77,56.97 U1.8 | 37.51,54.42 U1.3 | R_CHANGE.1 52.31,107.78 v46.02,101.5 46.02,100.19 46.74,99.48 47.42,99.48 47.44,99.5 47.63,99.5 IC1.2 48.33,100.2 49,100.2 56.89,108.08 60.09,108.08 R_RESET.1 60.5,107.67 60.5,104.46 68.15,96.81 TP16.TP 85.04,81.2 85.04,64.91 | C9.1 5.49,101.16 R8.2 7.45,101.19 v8.53,101.19 8.73,100.99 8.73,92.78 6.41,90.45 J4.P4 | Q2.3 79.29,28.3 79.29,27.88 v78.99,27.58 | U1.8 45.59,56.66 45.59,55.99 U1.7 | 66.29,57 45.32,57 U1.8
  Bottom 0.3: v75.29,27.13 75.74,27.58 75.74,28.3 | v145.69,36.42 v140.66,41.45 110.08,41.45 v92.14,59.39 | v8.53,101.19 v15.09,107.75 39.78,107.75 v46.02,101.5 | 75.74,28.3 75.74,38.1 v66.29,47.55 | v78.99,27.58 76.46,27.58 75.74,28.3
32KHZ
  Top 0.152: U2.9 17.95,42.25 18.75,41.45 61.11,41.45 71.93,52.27 87.63,52.27 90.07,49.84 91.14,49.84 91.29,49.99 91.29,58.52 90.52,59.29 R2-PINH1.1 88.33,59.29 U3.1
DN
  Top 0.152: D1.4 156.98,48.12 158.95,50.1 158.95,51.66 158.8,51.82 157.58,51.82 157.43,51.97 157.43,53.03 157.95,53.56 J2.B7 164.35,53.56 164.59,53.8 164.59,54.25 164.29,54.56 J2.A7
DP
  Top 0.152: 162.76,54.41 163.11,54.06 J2.A6 | 162.76,54.41 162.76,54.71 163.11,55.06 J2.B6 | 162.76,54.41 158.34,54.41 156.13,52.19 D1.6
EPD_3V3  (via drill 0.35)
  Top 0.3: EPD_C5.1 86.24,18.38 84.98,18.38 v84.73,18.14 84.16,18.14 83.12,17.1 83.12,14.99 | 83.12,14.99 J1.16 | J1.15 83.12,14.99 | v77.62,26.72 77.22,26.72 76.83,27.11 Q2.2 | v79.86,26.82 80.22,27.18 C7.1 82.02,27.76 L1.2 | v63.4,14.02 63.04,13.66 TP17.TP
  Bottom 0.3: v77.62,26.72 79.76,26.72 v79.86,26.82 84.73,21.95 v84.73,18.14 84.73,15.7 83.31,14.27 63.99,14.27 63.75,14.02 v63.4,14.02
EPD_3V3_C  (via drill 0.35)
  Top 0.3: v28.8,49.23 v20.57,57.45 | v70.41,28.65 71.78,30.02 73.91,30.02 R_CL1.2 76.55,29.32 Q2.1 | v20.57,60.5 20.57,62.41 U2.18 | v28.19,14.94 32.05,14.94 TP13.TP
  Bottom 0.3: v20.57,57.45 v20.57,60.5 | v28.8,49.23 36.88,41.15 36.88,23.62 | v28.19,14.94 36.73,23.47 36.88,23.62 | v70.41,28.65 69.71,29.35 67.41,29.35 64.06,26 39.26,26 36.88,23.62
EPD_BUSY  (via drill 0.35)
  Top 0.152: v88.24,17.22 86.62,15.6 J1.9 | v89.76,44.2 v88.54,42.98 | U2.26 10.33,62.76 42.98,95.4 64.48,95.4 65.94,96.86 | 65.94,96.86 TP9.TP | 65.94,96.86 65.94,97.92 v64.96,98.91
  Bottom 0.152: v88.24,17.22 88.24,35.81 88.54,36.12 v88.54,42.98 | v89.76,44.2 89.76,47.4 86.11,51.05 86.11,76.66 71.12,91.64 71.12,92.74 v64.96,98.91
EPD_CS  (via drill 0.35)
  Top 0.152: 53.6,33.98 52.58,33.98 51.79,34.77 D6.1 51.1,34.14 v50.6,34.14 | 53.6,33.98 54.56,33.98 59.59,39.01 84.43,39.01 87.63,35.81 91.59,35.81 92.33,35.07 92.77,35.07 93.09,34.75 94.29,34.75 94.64,34.4 94.64,25.6 85.12,16.08 J1.12 | v42.67,42.06 22.6,42.06 21.11,43.56 21.11,44.37 U2.11 20.49,45.35 18.4,47.44 11.84,47.44 10.21,49.07 9.3,49.07 6.71,46.48 6.71,15.24 TP10.TP | R9.1 52.53,33.4 53.02,33.4 53.6,33.98
  Bottom 0.152: v50.6,34.14 v42.67,42.06
EPD_DC
  Top 0.152: 14.09,22.79 18.9,17.98 66.63,17.98 66.8,17.81 69.5,17.81 69.67,17.98 72.85,17.98 78.18,12.65 90.41,12.65 91.34,13.58 91.34,15.31 88.52,18.14 87.78,18.14 85.62,15.97 J1.11 | 14.09,22.79 7.01,29.87 7.01,46.33 9.45,48.77 10.06,48.77 12.87,45.96 U2.5 | TP11.TP 14.09,22.79
EPD_RST  (via drill 0.35)
  Top 0.152: v25.6,11.12 23.09,11.12 TP12.TP | v16.61,52.12 v16.61,55.63 | J1.10 86.11,14.5 86.11,16 87.94,17.83 88.42,17.83 90.97,15.28 90.97,13.86 v90.37,13.26 | v16.61,59.59 16.61,62.42 U2.21
  Bottom 0.152: v90.37,13.26 89.76,13.26 87.63,11.12 v25.6,11.12 12.8,23.93 12.8,48.31 v16.61,52.12 | v16.61,55.63 v16.61,59.59
FLASH_CS  (via drill 0.35)
  Top 0.152: U2.12 21.76,45.38 24.99,48.62 34.17,48.62 R5.1 | U1.1 36.24,56.97 35.35,56.08 35.35,49.8 R5.1 | v36.42,50.29 36.74,49.98 D9.1 | R5.1 34.66,49.9 v35.05,50.29
  Bottom 0.152: v35.05,50.29 v36.42,50.29
GDR  (via drill 0.35)
  Top 0.152: v90.07,15.54 90.12,15.49 J1.2 | Q3.1 66.27,17.03 64.21,14.97 v64.21,13.74 | v70.26,13.11 69.94,13.11 R4.1
  Bottom 0.152: v90.07,15.54 88.7,14.17 84.18,14.17 82.74,12.73 70.63,12.73 v70.26,13.11 69.62,13.74 v64.21,13.74
GND  (via drill 0.35)
  Top 0.152: 12.28,99.97 11.12,99.97 8.99,102.11 4.72,102.11 4.42,101.8 4.42,100.58 5.17,99.83 C9.2 5.86,99.83 6.16,99.53 6.16,99.07 2.97,95.87 J4.G4 3.07,95.4 3.07,93.71 3.58,93.2 5.07,93.2 J4.P6 5.05,92.65 1.97,89.57 J4.G3 1.98,82.33 v1.98,67.97 | 12.28,99.97 14.17,99.97 22.28,108.08 BOOT_BUTTON.1 BOOT_BUTTON.2 28.18,108.16 C6.2 | 163.28,59.28 159.56,59.28 150.57,50.29 150.57,49.23 151.27,48.53 R2-USB.2 151.87,49.07 D1.2 154.08,49.52 154.31,49.52 155.33,50.54 155.33,53.02 v155.74,53.42 | 154.69,9.14 153.7,9.14 153.51,9.33 SENSOR2.7 153.51,10.93 152.71,11.73 SENSOR2.1 | 128.26,50.51 128.93,49.84 128.93,43.13 128.32,42.52 127.8,42.52 126.82,41.54 R1_PWRUSB.1 | 141.6,39.15 162.54,18.21 164.91,18.21 J3.1 165.31,14.41 161.51,10.61 155.83,10.61 SENSOR2.5 155.13,9.59 154.69,9.14 | 141.6,39.15 139.67,41.08 C1_BAT2.2 138.05,41.12 136.36,39.43 C3.- 133.62,42.14 132,42.14 | 86.92,34.8 85.65,33.53 85.65,30.48 | 86.92,34.8 87.33,35.2 89.14,35.2 90.12,34.22 D3.1 | 85.65,30.48 82.74,27.57 C7.2 81.74,26.18 81.74,25.96 80.52,24.74 EPD_C11.2 EPD_C12.2 | 85.65,30.48 86.72,29.41 89.27,29.41 90.59,30.73 92.78,30.73 92.95,30.56 92.95,26.04 91.75,24.84 EPD_C5.2 91.31,24.75 EPD_C6.2 EPD_C7.2 EPD_C8.2 EPD_C9.2 EPD_C10.2 | 86.92,34.8 86.92,36.06 84.28,38.71 83.06,38.71 82.91,38.56 82.91,37.34 84.43,35.81 84.73,35.81 85.04,35.51 85.04,33.38 84.28,32.61 79.1,32.61 77.57,31.09 77.57,28.81 77.11,28.35 76.33,28.35 76.18,28.19 76.18,25.54 75.54,24.9 | 95.25,33.56 95.25,36.86 90.04,42.06 87.78,42.06 85.34,44.5 85.34,45.11 85.73,45.5 | 95.25,33.56 95.25,25.75 92.32,22.83 92.32,12.69 J1.MP1 85.54,11.99 v85.39,12.14 85.24,11.99 J1.MP2 69.7,11.99 69.19,12.5
  Top 0.152: 85.73,45.5 86.41,46.18 92.2,46.18 94.18,48.16 94.18,50.2 C10_SUPERCAP.1 93.24,51.44 96.92,55.12 96.92,60.38 89.7,67.59 89.7,90.5 83.62,96.58 | 95.25,33.56 103.22,41.54 R1_PWRUSB.1 | 44.44,107.9 C10.2 37.47,100.81 26.6,100.81 17.74,91.95 17.12,91.95 J4.G2 16.22,90.16 17.07,89.31 17.07,86.2 J4.G1 7.79,76.92 U2.28 7.79,62.16 v8.84,61.11 | 44.44,107.9 44.44,108.03 45.16,107.31 45.16,100.52 46.76,98.92 IC1.3 48.45,99.37 48.53,99.37 48.78,99.62 C_DELAY.2 | 83.62,96.58 TP5.TP | J2.B12 J2.A1 163.22,50.5 162.1,50.5 161.8,50.2 161.8,49.5 162.1,49.2 J2.MP3 | 163.28,59.28 162.8,58.8 162.8,58 163.14,57.66 J2.A12 J2.B1 | 128.26,50.51 127.18,51.59 C1_BAT.2 | 128.95,51.01 128.95,51.58 129.54,52.18 130.53,52.18 130.76,51.95 130.76,51.21 131.33,50.64 MCP73831.2 136.42,50.17 136.63,50.17 138.95,47.85 140.97,47.85 142.21,49.09 U4.4 142.37,51.93 142.65,51.93 142.79,52.07 142.79,52.12 143.09,52.41 | 128.95,51.01 128.95,50.65 128.81,50.51 128.26,50.51 | 141.6,39.15 141.65,39.2 143.9,39.2 146.07,37.03 150.27,37.03 152.86,39.62 152.86,41.2 C4_USB.2 156.18,46.03 C5_USB.2 161.18,46.12 161.18,46.13 J2.MP3 | 83.62,96.58 83.56,96.64 TP4.TP 67.86,105.2 67.86,107.7 | v48.46,39.17 48.51,39.12 D8.2 D6.2 D11.2 56.39,36.27 68.28,48.16 83.21,48.16 84.03,48.98 U3.13 84.81,48.72 84.81,47.8 85.68,46.93 C8.2 85.73,45.5 | C2_BAT.2 142.07,53.4 U4.1 142.37,53.11 142.65,53.11 143.19,52.57 U4.9 143.09,52.41 | U4.6 143.23,52.27 143.09,52.41 | 82.19,13.61 81.99,13.41 78.79,13.41 74.22,17.98 74.22,20.1 73.6,20.72 | 82.19,13.61 82.62,14.04 J1.17 | 82.19,13.61 82.79,13.61 83.14,13.26 v84.89,13.26 86.41,13.26 87.12,13.97 J1.8
  Top 0.152: 73.6,20.72 75.54,22.66 75.54,24.9 | 73.6,20.72 73.55,20.67 | 73.55,20.67 EPD_C1.2 | EPD_C2.2 73.53,20.65 73.55,20.67 | R2.1 65.83,12.92 SJ1.1 65.2,12.07 66.14,11.12 67.43,11.12 68.8,12.5 69.19,12.5 | 69.19,12.5 R4.2 | R2_BAT.1 129.76,50.2 128.95,51.01 | IC4.2 132,42.14 | 132,42.14 131.41,41.55 131.41,39.97 129.54,38.1 128.47,38.1 127.83,38.74 C1_BAT1.2 127.83,39.11 R1_PWRUSB.1 | v9.75,48.16 7.79,46.2 U2.1 | 44.44,107.9 46.95,107.9 CHANGE_BUTTON.1 CHANGE_BUTTON.2 | 67.86,107.7 C5.2 | RESET_BUTTON.1 RESET_BUTTON.2 67.4,108.16 67.86,107.7 | 163.28,59.28 163.42,59.42 J2.MP4 164.65,59.82 167.78,59.82 J2.MP2 169.08,58.52 169.08,50.1 J2.MP1 J2.MP3 | R2-USB1.1 158.06,51.31 v156.72,51.31 | C1.2 C2.2 156.21,5.48 156.57,5.85 156.57,8.12 155.55,9.14 154.69,9.14 | D12.2 12.28,99.97 | 75.54,24.9 75.54,24.99 D10.2 | U1.9 41.02,55.06 39.3,53.34 v38.56,53.34 37.68,53.34 U1.4 37.2,52.86 37.2,52.3 38.62,50.88 38.62,49.11 37.23,47.72 D9.2 | U2.29_5 U2.29_4 13.71,50.78 14.56,50.78 U2.29_7 U2.29_8 14.86,52.34 14.86,53.38 U2.29_9 U2.29_6 13.41,53.59 12.36,53.59 U2.29_3 U2.29_2 U2.29_1 11.58,50.31 v11.58,49.99
  Bottom 0.152: v9.75,48.16 v11.58,49.99 11.58,56.02 | 11.58,56.02 11.58,58.37 v8.84,61.11 8.84,62.85 3.72,67.97 v1.98,67.97 | v156.72,51.31 156.72,52.44 v155.74,53.42 | v84.89,13.26 85.39,12.76 v85.39,12.14 | v48.46,39.17 48.46,42.98 39.49,51.95 39.49,52.15 38.56,53.09 v38.56,53.34 38.01,52.79 17.21,52.79 15.6,54.4 13.2,54.4 11.58,56.02
  pour Top: 75.7,10.1 75.7,10.1 94.1,10.1 94.1,10.1 94.1,0.1 170.1,0.1 170.1,67.1 92.1,67.1 92.1,67.1 92.1,111.1 68.9,111.1 68.9,110.4 68.9,110.4 19.4,110.4 19.4,110.4 19.4,111.1 0.1,111.1 0.1,63.7 6.6,63.7 6.6,63.7 6.6,43.8 6.6,43.8 0.1,43.8 0.1,0.1 75.7,0.1
  pour Bottom: 75.7,10.1 75.7,10.1 94.1,10.1 94.1,10.1 94.1,0.1 170.1,0.1 170.1,67.1 92.1,67.1 92.1,67.1 92.1,111.1 68.9,111.1 68.9,110.4 68.9,110.4 19.4,110.4 19.4,110.4 19.4,111.1 0.1,111.1 0.1,63.7 6.6,63.7 6.6,63.7 6.6,43.8 6.6,43.8 0.1,43.8 0.1,0.1 75.7,0.1
  pour Top: 29.41,107.11 29.14,106.84 29.12,106.82 28.03,106.82 7.08,85.87 7.08,84.23 7.1,84.21 15.76,92.86 15.78,92.88 17.17,92.88 33.46,109.16 33.48,109.18 43.77,109.18 43.77,109.62 43.79,109.64 43.81,109.66 43.83,109.68 45.57,109.68 45.71,109.81 45.73,109.83 46.27,109.83 46.27,110.12 29.23,110.12 29.23,108.58 29.41,108.39 29.43,108.37 29.43,107.13
  pour Top: 57.27,95.98 57.27,96.07 57.24,96.11 57.22,96.13 57.22,96.47 43.03,96.47 10.18,63.63 10.92,63.63 42.91,95.61 42.93,95.63 57.57,95.63 57.57,95.72 57.53,95.72 57.51,95.74 57.29,95.96
  pour Top: 24.98,44.13 34.72,44.13 35.42,44.82 24.98,44.82
  pour Top: 12.47,47.63 12.47,47.72 12.24,47.96 12.22,47.98 12.22,48.02 12.24,48.04 12.29,48.1 6.77,53.62 6.73,53.62 6.73,46.78 9.21,49.26 9.23,49.28 10.27,49.28 10.29,49.26 11.93,47.63
  pour Top: 163.48,19.98 166.27,19.98 166.27,23.97 164.47,25.77 163.08,25.77 162.83,25.52 162.83,20.63
GPIO8
  Top 0.152: U2.10 19.35,44.86 R1.2
I2C_PW  (via drill 0.35)
  Top 0.152: v23.62,60.35 21.76,62.21 U2.17 | C2.1 C1.1 R2-PINH.2 153.59,6.77 R1_PINH.2 151.7,7.58 151.7,8.9 SENSOR2.8 152.71,11.21 150.61,13.31 119.28,13.31 v118.87,13.72 150.29,13.72 153.01,13.72 153.51,13.22 SENSOR2.2 153.51,12.62 154.31,11.82 SENSOR2.6
  Bottom 0.152: v23.62,60.35 72.24,60.35 v118.87,13.72
INT_RTC  (via drill 0.35)
  Top 0.152: v84.56,60.33 84.58,60.3 84.58,59.44 85.21,58.8 U3.3 85.31,58.33 84.53,57.55 43.72,57.55 43.38,57.89 33.44,57.89 v27.28,51.73 | v85.01,61.87 85.21,61.87 R1_PINH1.1 | U2.8 16.68,41.84 v16.76,41.76 | v28.96,16.76 37.28,16.76 TP15.TP
  Bottom 0.152: v28.96,16.76 16.76,28.96 v16.76,41.76 26.73,51.73 v27.28,51.73 | v85.01,61.87 85.04,61.84 85.04,60.81 v84.56,60.33
IO/BOOT
  Top 0.152: 27.62,108.93 28.4,108.93 C6.1 28.55,108.91 29.23,108.23 29.23,107.34 29.09,107.2 27.73,107.2 8.07,87.55 8.07,87.28 6.86,86.06 6.86,61.54 9.42,58.98 23.16,58.98 24.3,60.11 U2.15 | 27.62,108.93 20.2,108.93 | 20.2,108.93 R_BOOT.2 | BOOT_BUTTON.4 22.07,109.45 20.72,109.45 20.2,108.93 | BOOT_BUTTON.3 26.89,109.66 27.62,108.93
IO/CHANGE
  Top 0.152: C10.1 44.44,109.33 | R_CHANGE.2 53.24,109.12 52.7,109.12 | 52.7,109.12 45.27,109.12 | 45.27,109.12 44.66,109.12 44.44,109.33 | 44.44,109.33 44.07,108.97 33.56,108.97 17.25,92.66 15.85,92.66 7.14,83.95 7.14,61.66 8.29,60.5 12.5,60.5 14.14,62.15 U2.23 | CHANGE_BUTTON.3 52.16,109.66 52.7,109.12 | CHANGE_BUTTON.4 45.81,109.66 45.27,109.12
MISO  (via drill 0.35)
  Top 0.152: v36.11,55.63 37.43,55.63 U1.2 | v10.06,61.11 9.06,62.11 U2.27 9.06,62.78 42.97,96.69 TP6.TP | D12.1 9.68,100.96 8.84,101.8 4.88,101.8 4.72,101.65 4.72,100.74 5.03,100.43 6.86,100.43 R8.1 7.42,94.2 6.97,93.75 J4.P7 6.07,93.75 v7.41,92.42
  Bottom 0.152: v36.11,55.63 17.53,55.63 16.92,55.02 16.15,55.02 v10.06,61.11 9.12,62.05 9.12,62.97 3.56,68.53 3.56,89.12 6.86,92.42 v7.41,92.42
MOSI  (via drill 0.35)
  Top 0.152: v84.05,16 84.12,15.94 J1.14 | TP7.TP 59.22,87.04 v58.51,87.75 | D11.1 53.01,34.77 52.27,35.51 51.05,35.51 49.99,34.44 49.99,33.08 51.3,31.76 53.25,31.76 R7.1 54.1,32.31 v67.82,32.31 | J4.P3 7.42,89.35 v7.47,89.31 | v44.35,52.58 44.92,53.16 U1.5 46.34,53.16 56.39,43.11 v56.39,42.06 | v15.42,46.89 U2.7
  Bottom 0.152: v15.42,46.89 20.98,46.89 26.55,52.46 38.75,52.46 39.19,52.02 39.19,51.81 47.85,43.14 47.85,38.86 48.16,38.56 52.88,38.56 v56.39,42.06 56.84,42.06 66.6,32.31 v67.82,32.31 84.05,16.07 v84.05,16 | v44.35,52.58 40.69,56.24 25.45,56.24 22.25,59.44 22.25,59.74 19.66,62.33 19.66,77.11 9.95,86.82 5.8,86.82 4.12,88.51 4.12,88.89 4.38,89.15 4.76,89.15 5.03,88.89 5.03,88.64 6.28,87.38 8.53,87.38 8.96,87.81 9.45,87.81 | 9.45,87.81 58.44,87.81 v58.51,87.75 | v7.47,89.31 7.96,89.31 9.45,87.81
N$1
  Top 0.152: J2.A5 163.65,53.03 163.07,53.03 162.55,52.52 R2-USB1.2
N$2
  Top 0.152: R2-USB.1 157.58,56.08 163.66,56.08 J2.B5
N$3
  Top 0.152: Q1.2 140.74,46.56 140.06,47.24 135.18,47.24 131.03,43.09 IC4.1 129.68,42.64 129.1,42.64 128.88,42.42 128.88,41.3 129.1,41.08 | D2.1 129.1,41.08 | C1_BAT1.1 130.43,40.12 130.43,40.89 IC4.3 130.02,41.08 129.1,41.08
N$4
  Top 0.152: 89.3,33.83 88.3,33.83 D3.2 | 89.3,33.83 87.92,32.46 D4.1 | C4.1 93.04,34.14 92.52,33.62 90.75,33.62 90.53,33.83 89.3,33.83
N$5
  Top 0.152: R1_BAT.1 135.95,49.2 MCP73831.1
N$6
  Top 0.152: CHG_LED.C 130.04,50.55 130.45,50.14 130.45,49.07 131.78,47.75 R1_BAT.2
N$7
  Top 0.152: R2_BAT.2 133.34,49.7 MCP73831.5
N$8
  Top 0.152: J1.24 78.7,14.91 EPD_C12.1
N$9
  Top 0.152: D7.1 86.56,62.01 86.56,60.5 87.17,59.89 87.17,53.8 90.53,50.44 R_CAPACITOR.2
N$10
  Top 0.152: J1.22 80.12,21.35 EPD_C10.1
N$11
  Top 0.152: C_DELAY.1 52.07,100.82 IC1.5
N$12
  Top 0.152: J1.20 81.12,18.91 EPD_C8.1
N$13
  Top 0.152: J1.19 81.62,17.52 EPD_C7.1
N$14
  Top 0.152: J1.18 82.12,16.6 88.97,23.45 EPD_C6.1
N$16  (via drill 0.35)
  Top 0.152: v88.54,16.31 88.62,16.23 J1.5 | v70.71,19.2 70.86,19.35 EPD_C2.1
  Bottom 0.152: v88.54,16.31 90.22,16.31 90.68,15.85 90.68,14.63 87.48,11.43 64.62,11.43 62.48,13.56 62.48,14.48 67.21,19.2 v70.71,19.2
N$17  (via drill 0.35)
  Top 0.152: v88.54,13.41 89.12,13.99 J1.4 | v72.69,18.59 73.47,19.37 EPD_C1.1
  Bottom 0.152: v88.54,13.41 85.65,13.41 85.19,13.87 84.3,13.87 82.86,12.43 64.08,12.43 62.79,13.72 62.79,14.33 67.06,18.59 v72.69,18.59
PREVGH
  Top 0.152: J1.21 80.62,20.15 EPD_C9.1 | J1.21 | J1.21 80.62,14.02 80.31,13.72 78.94,13.72 77.88,14.78 77.88,25.15 78.33,25.6 78.33,27.13 78.18,27.28 78.18,31.24 79.25,32.31 84.43,32.31 85.34,33.22 85.34,35.66 83.71,37.3 D5.1
PREVGL
  Top 0.152: J1.23 79.62,22.57 EPD_C11.1 80.59,23.44 81.23,24.08 81.23,24.99 81.69,25.45 85.7,25.45 90.38,30.13 D4.2
RESE  (via drill 0.35)
  Top 0.152: v89.15,15.54 89.62,15.08 J1.3 | Q3.2 70.52,17.03 71.17,17.68 72.01,17.68 R3.1 76.2,13.49 v76.2,13.34
  Bottom 0.152: v76.2,13.34 76.5,13.64 83.22,13.64 85.12,15.54 v89.15,15.54
RESE'
  Top 0.152: R3.2 71.38,16.75 70.64,16.75 68.15,14.26 67.3,14.26 | 67.3,14.26 R2.2 | SJ1.2 66.72,13.68 67.3,14.26
RESET  (via drill 0.35)
  Top 0.152: C5.1 67.81,109.04 67.77,109.08 | RESET_BUTTON.3 67.19,109.66 67.77,109.08 | RESET_BUTTON.4 60.97,109.66 R_RESET.2 | v10.21,46.79 10.33,46.67 U2.3 | R_RESET.2 56.26,109.08 IC1.1 47.68,100.82 v47.02,100.16 | R_RESET.2 60.49,108.98 67.76,108.98 C5.1 | 67.77,109.08 C5.1
  Bottom 0.152: v10.21,46.79 9.14,47.85 9.14,51.05 11,52.91 11,58.03 8.23,60.81 8.23,63.06 3.93,67.36 1.68,67.36 1.22,67.82 1.22,87.17 6.71,92.66 14.21,100.16 v47.02,100.16
RTC_RST
  Top 0.152: U2.16 23.03,62.81 23.77,63.55 79.7,63.55 84.03,59.22 U3.4
RX
  Top 0.152: U2.24 12.87,62.86 42.2,92.19 TP2.TP
SCK  (via drill 0.35)
  Top 0.152: v13.41,48.01 12.65,48.01 6.58,54.08 6.58,64.41 4.57,66.42 v4.57,88.7 4.57,90.83 5.29,91.55 J4.P5 | v38.68,51.57 42.43,51.57 U1.6 47.17,54.42 57.76,43.84 v57.76,42.06 | J1.13 84.73,14.6 84.73,16.69 v84.1,17.33 | U2.6 14.14,46.48 v13.99,46.63 | TP8.TP 71.56,87.09 v71.57,87.1 | R6.1 74.38,26.21 v75.29,26.21 75.26,26.21 D10.1
  Bottom 0.152: v57.76,42.06 59.44,42.06 v75.29,26.21 84.05,17.45 84.05,17.37 v84.1,17.33 | v13.41,48.01 13.41,47.21 v13.99,46.63 15.03,46.63 15.48,46.18 20.73,46.18 26.73,52.18 37.89,52.18 38.5,51.57 v38.68,51.57 | v71.57,87.1 6.17,87.1 v4.57,88.7
SCL  (via drill 0.35)
  Top 0.152: v22.86,59.74 20.42,59.74 17.95,62.21 U2.20 | v80.01,51.66 86.11,51.66 87.84,49.92 U3.16 88.58,49.49 v88.7,49.38 | v145.45,51.49 144.76,52.19 144.76,52.47 144.46,52.77 U4.7 | R2-PINH.1 153.61,5.34 154.08,4.88 156.36,4.88 166.19,14.7 166.19,20.24 166.07,20.36 165.76,20.36 J3.4 165.24,20.88 v163.22,20.88 | v156.73,15.54 156.73,14.45 SENSOR2.4
  Bottom 0.152: v163.22,20.88 162.64,21.45 | 162.64,21.45 148.38,35.73 148.28,35.81 | 148.28,35.81 145.69,38.41 145.69,51.25 v145.45,51.49 | 162.64,21.45 v156.73,15.54 | v22.86,59.74 71.93,59.74 v80.01,51.66 | 148.28,35.81 102.26,35.81 v88.7,49.38
SDA  (via drill 0.35)
  Top 0.152: v146.3,41.98 146.3,50.66 146.13,50.84 146.13,51.74 144.69,53.19 144.26,53.19 U4.8 | v20.27,63.86 19.22,62.81 U2.19 | v85.5,51.05 86.58,49.98 U3.15 | R1_PINH.1 152.51,4.86 152.8,4.57 156.51,4.57 166.47,14.52 166.47,24.05 164.51,26 163.01,26 v162.61,25.6 162.61,20.57 163.38,19.81 J3.3 | v154.36,15.54 154.36,12.88 SENSOR2.3
  Bottom 0.152: v20.27,63.86 72.69,63.86 v85.5,51.05 85.5,47.55 117.51,15.54 v154.36,15.54 156.1,15.54 156.55,15.09 158.35,15.09 163.83,20.57 163.83,24.38 v162.61,25.6 146.3,41.91 v146.3,41.98
SRC  (via drill 0.35)
  Top 0.152: v87.94,36.42 91.44,36.42 92.42,35.44 C4.2 | Q3.3 68.84,28 78.77,37.93 D5.2 81.47,37.93 82,37.4 82,36.71 v82.5,36.21 82.5,35.51 L1.1
  Bottom 0.152: v87.94,36.42 82.71,36.42 v82.5,36.21
SS_SD  (via drill 0.35)
  Top 0.152: v17.83,41.45 17.53,41.15 13.19,41.15 11.6,42.74 U2.4 | v25.15,49.23 v16,58.37 | v36.2,40.84 42.52,40.84 48.51,34.85 D8.1 48.63,34.65 R10.1 | v7.62,87.84 6.63,87.84 J4.P2
  Bottom 0.152: 25.15,41.45 v17.83,41.45 | v16,58.37 7.62,66.75 7.62,84.61 3.84,88.39 3.84,89 4.27,89.43 4.88,89.43 6.47,87.84 v7.62,87.84 | 25.15,41.45 v25.15,49.23 | v36.2,40.84 35.59,41.45 25.15,41.45
TX
  Top 0.152: U2.25 11.6,62.81 42.57,93.77 57.84,93.77 TP1.TP
USB_D+  (via drill 0.35)
  Top 0.152: v87.48,44.2 87.48,43.13 88.24,42.37 89.76,42.37 v99.84,52.44 | v44.96,48.77 39.17,48.77 35.39,44.99 U2.14 | v152.4,49.99 152.43,50.02 D1.1
  Bottom 0.152: v152.4,49.99 148.28,49.99 146,52.27 100,52.27 v99.84,52.44 | v87.48,44.2 82.91,48.77 v44.96,48.77
USB_D-  (via drill 0.35)
  Top 0.152: v85.95,44.81 91.29,44.81 110.41,63.93 135.68,63.93 146.99,52.62 146.99,51.75 150.78,47.95 153.46,47.95 D1.3 | v44.2,48.16 39.01,48.16 34.75,43.89 23.8,43.89 23.03,44.66 U2.13
  Bottom 0.152: v85.95,44.81 69.95,44.81 66.6,48.16 v44.2,48.16
VBAT
  Top 0.3: 140.99,52.27 140.36,51.65 140.36,48.81 Q1.3 140.47,48.66 139.55,49.58 139.55,50.64 C2_BAT.1 137.58,51.59 MCP73831.3 133.55,53.99 TP3.TP | 140.99,52.27 U4.3 | 140.99,52.27 141.48,52.77 U4.2
VBUS
  Top 0.3: Q1.1 139.56,45.88 144.14,41.3 151.54,41.3 PFMF.050.1.2 151.96,41.6 C4_USB.1 154.79,44.61 C5_USB.1 | MCP73831.4 133.22,51.46 131.63,51.46 CHG_LED.A 131.42,51.67 131.42,52.13 130.97,52.58 126.8,52.58 125.88,53.49 | C5_USB.1 154.79,48.11 155.75,49.07 D1.5 | C5_USB.1 151.38,46.12 146.61,50.89 146.61,52.5 135.56,63.55 127.41,63.55 125.88,62.02 TP14.TP 125.88,53.49 | 125.88,53.49 C1_BAT.1 125.88,44.99 D2.2 125.74,43.18 R1_PWRUSB.2
VRTC
  Top 0.3: U3.14 85.31,48.66 C8.1 89.43,46.93 90.6,48.1 R_CAPACITOR.1 90.9,49.44 92.74,49.44 C10_SUPERCAP.2
VUSB  (via drill 0.35)
  Top 0.152: J2.A4 J2.B9 | PFMF.050.1.1 156.8,41.14 156.8,40.4
  Top 0.3: v160,41.7 158.7,40.4 156.8,40.4 | J2.B9 163.75,52.13 164.37,52.13 165.59,53.35 165.6,53.35 165.6,55.26 164.38,56.48 164.3,56.56 | v162.1,57.65 162.1,57.36 162.6,56.86 J2.A9 164,56.86 164.3,56.56 | J2.B4 164.3,56.56
  Bottom 0.3: v162.1,57.65 160,55.55 v160,41.7

## Text on the board
tPlace: Tudor Zaharia